# Altium PCB MC0202S_V0.91.pcbdoc
Units mm, origin at the board's own origin, x right, y up, seen from the top; angles counter-clockwise.
Board outline 100 x 68 mm, 4 copper layers (Top Layer, Mid-Layer 1, Mid-Layer 2, Bottom Layer); 151 components, 104 nets, 506 pads, 163 vias.
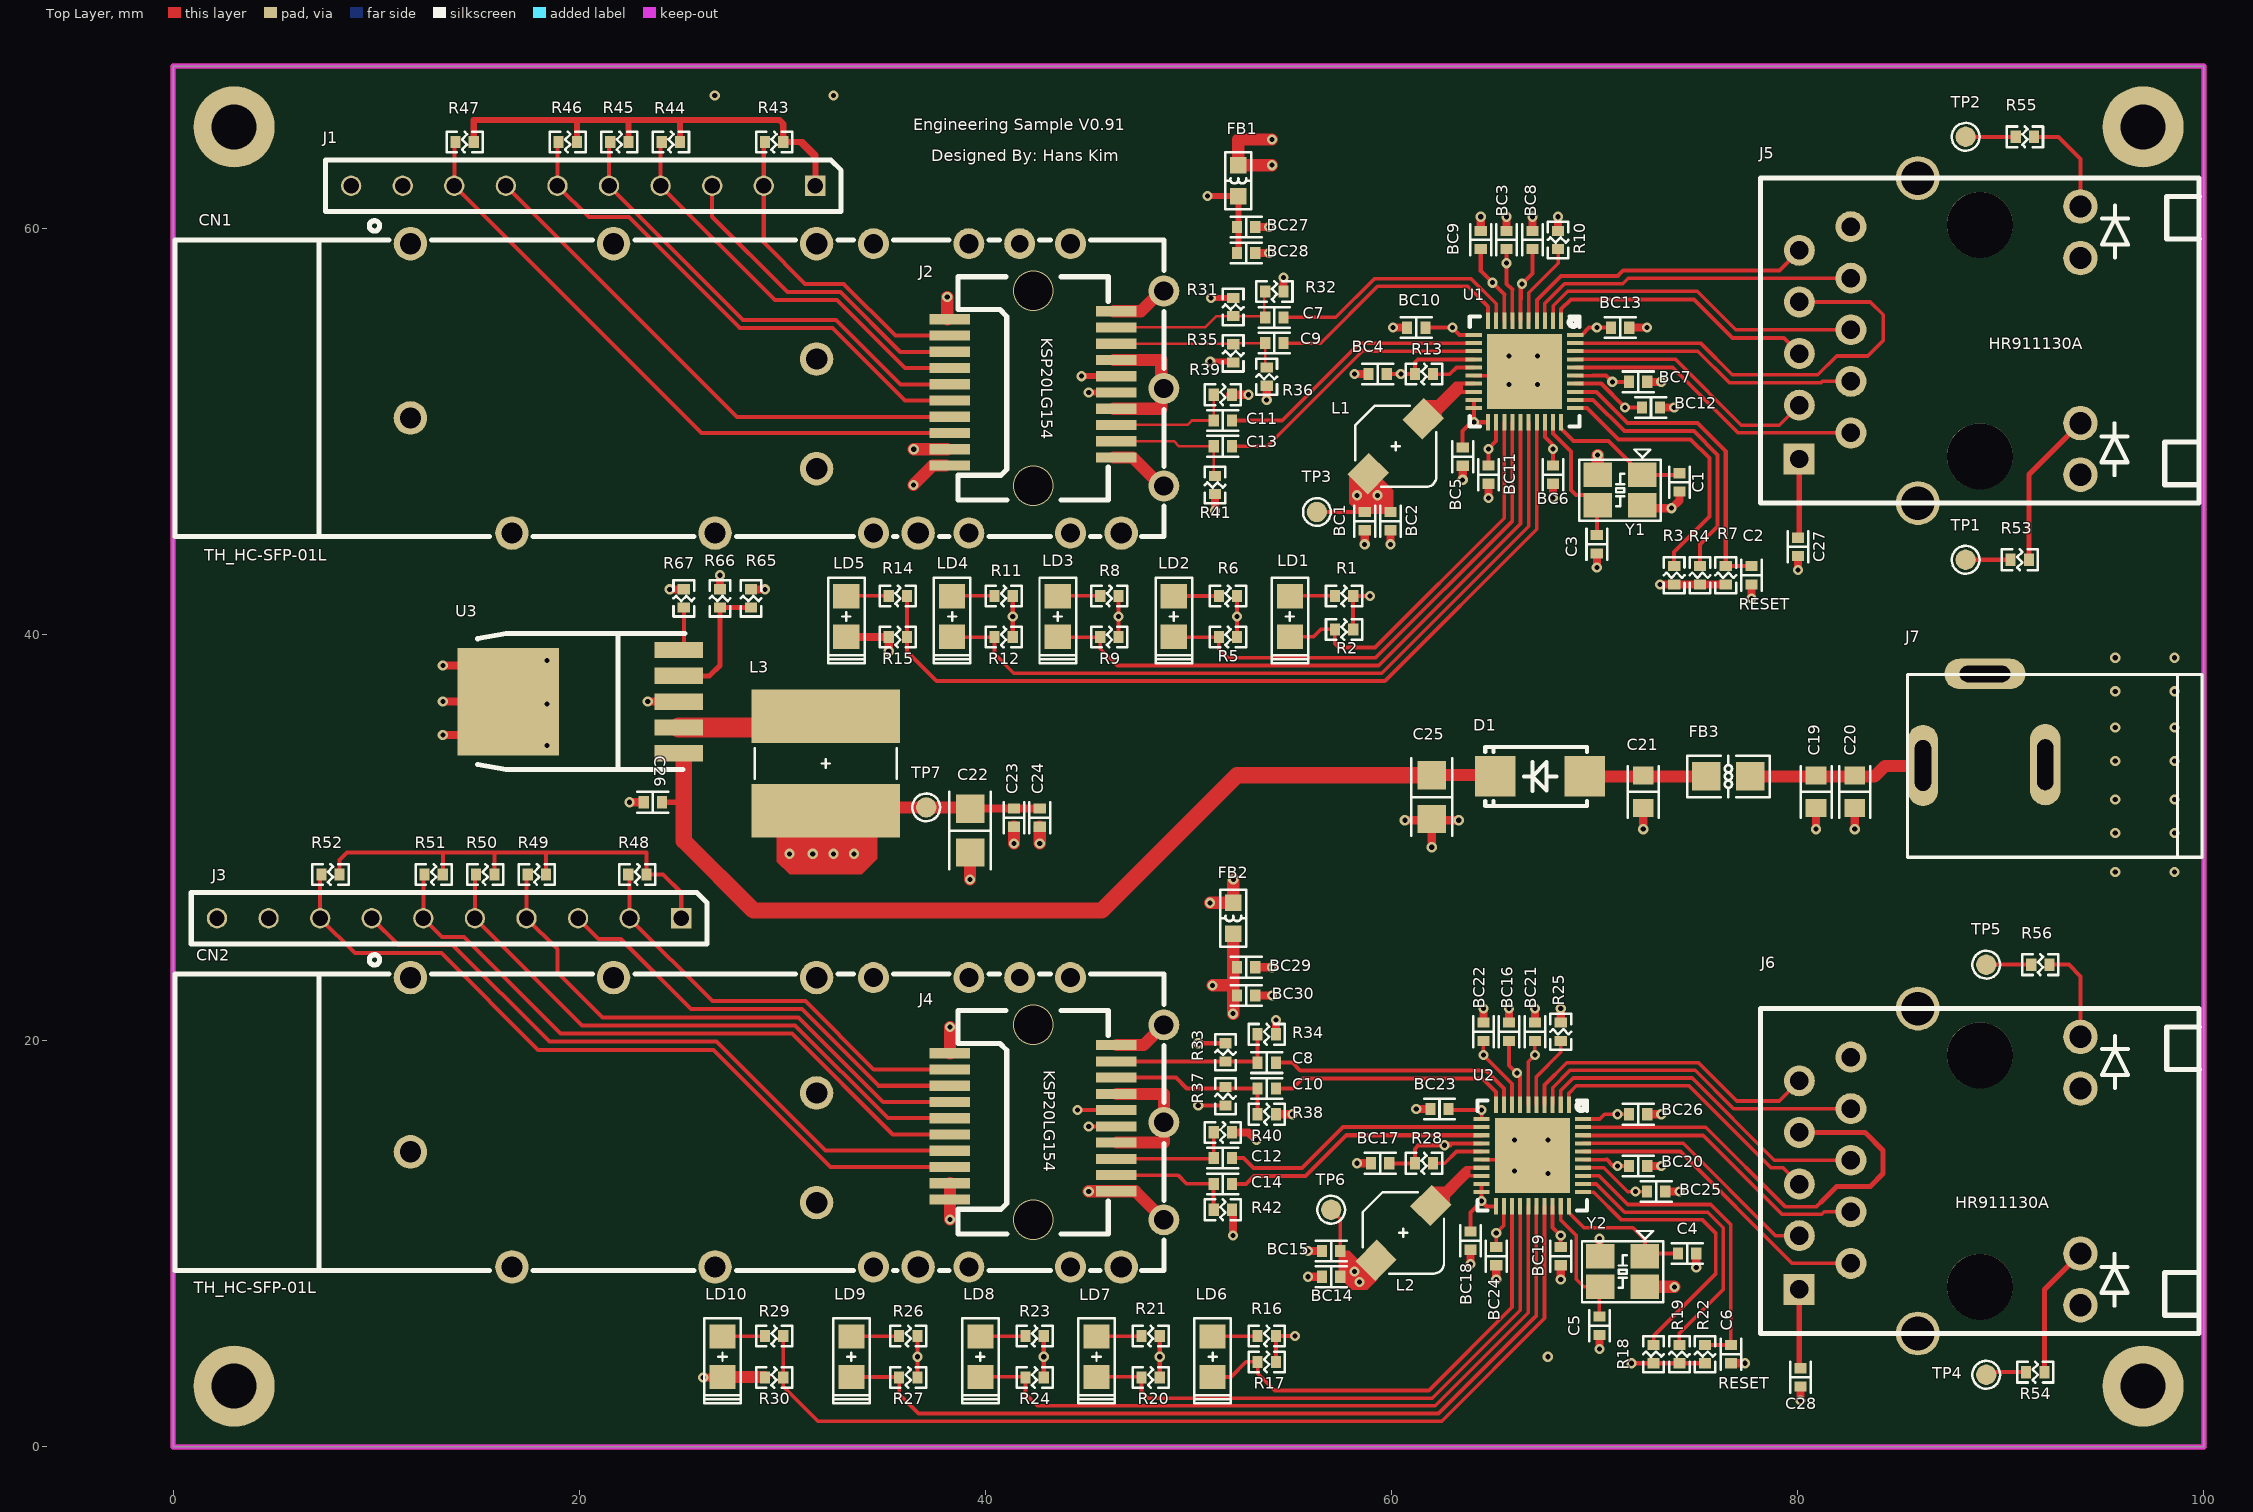
[diagram p0: Top Layer view]
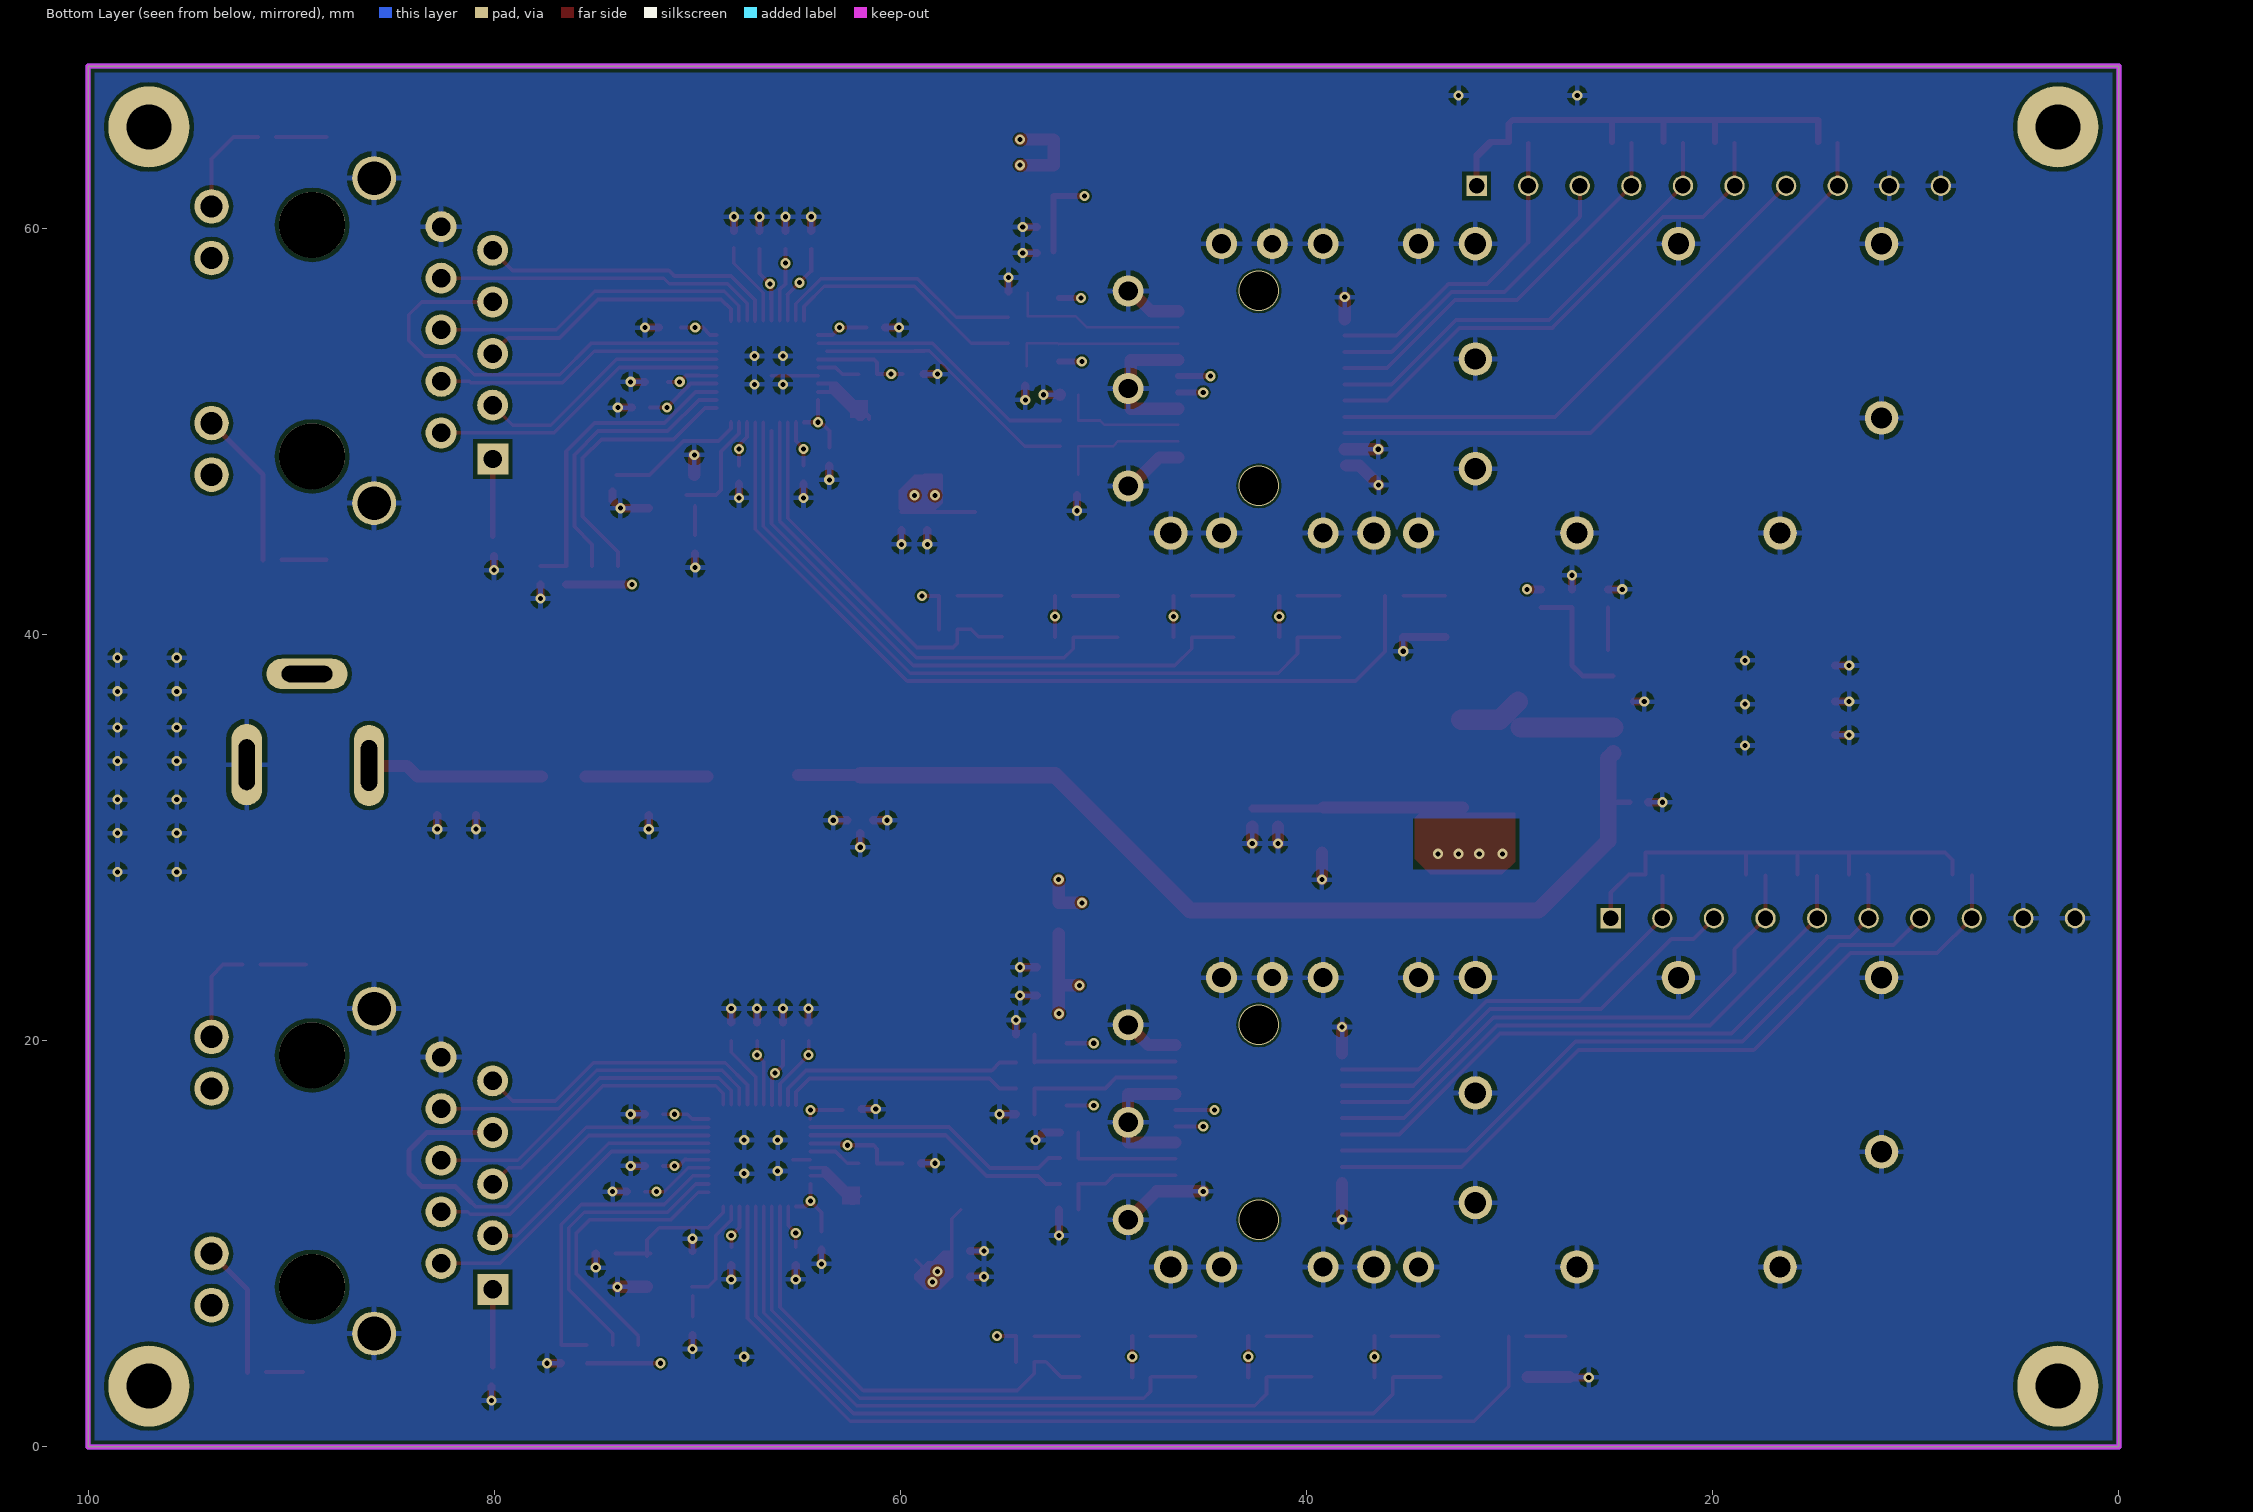
[diagram p1: Bottom Layer view, seen from below]
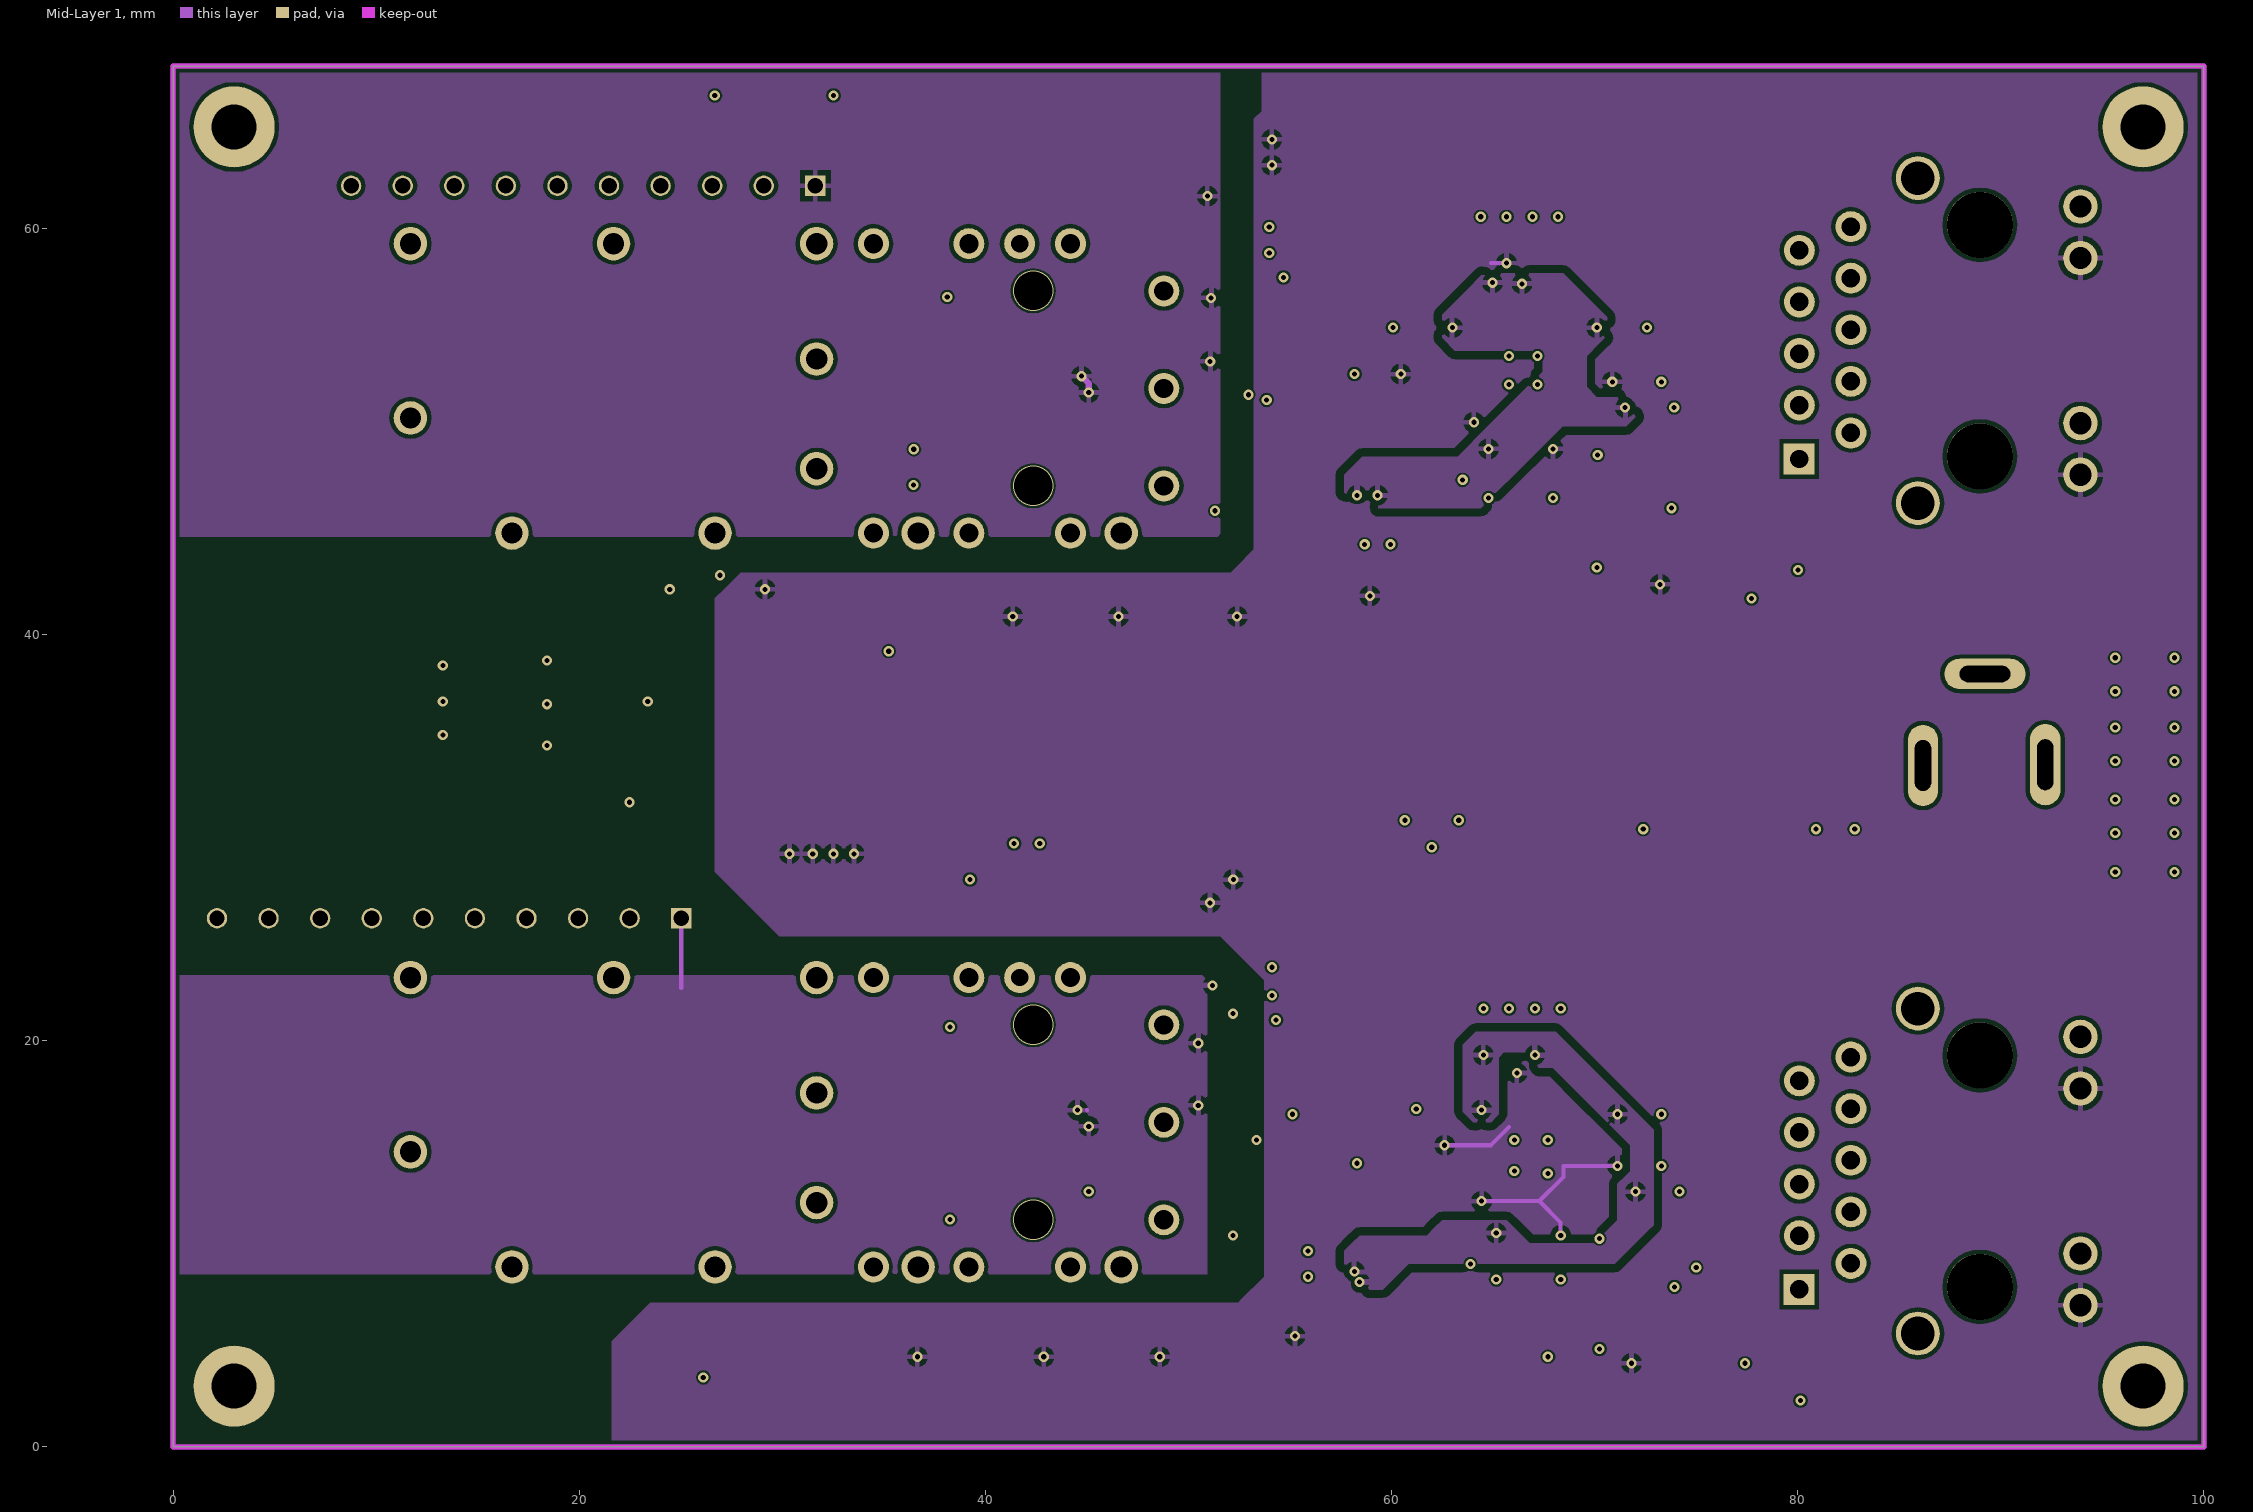
[diagram p2: Mid-Layer 1]
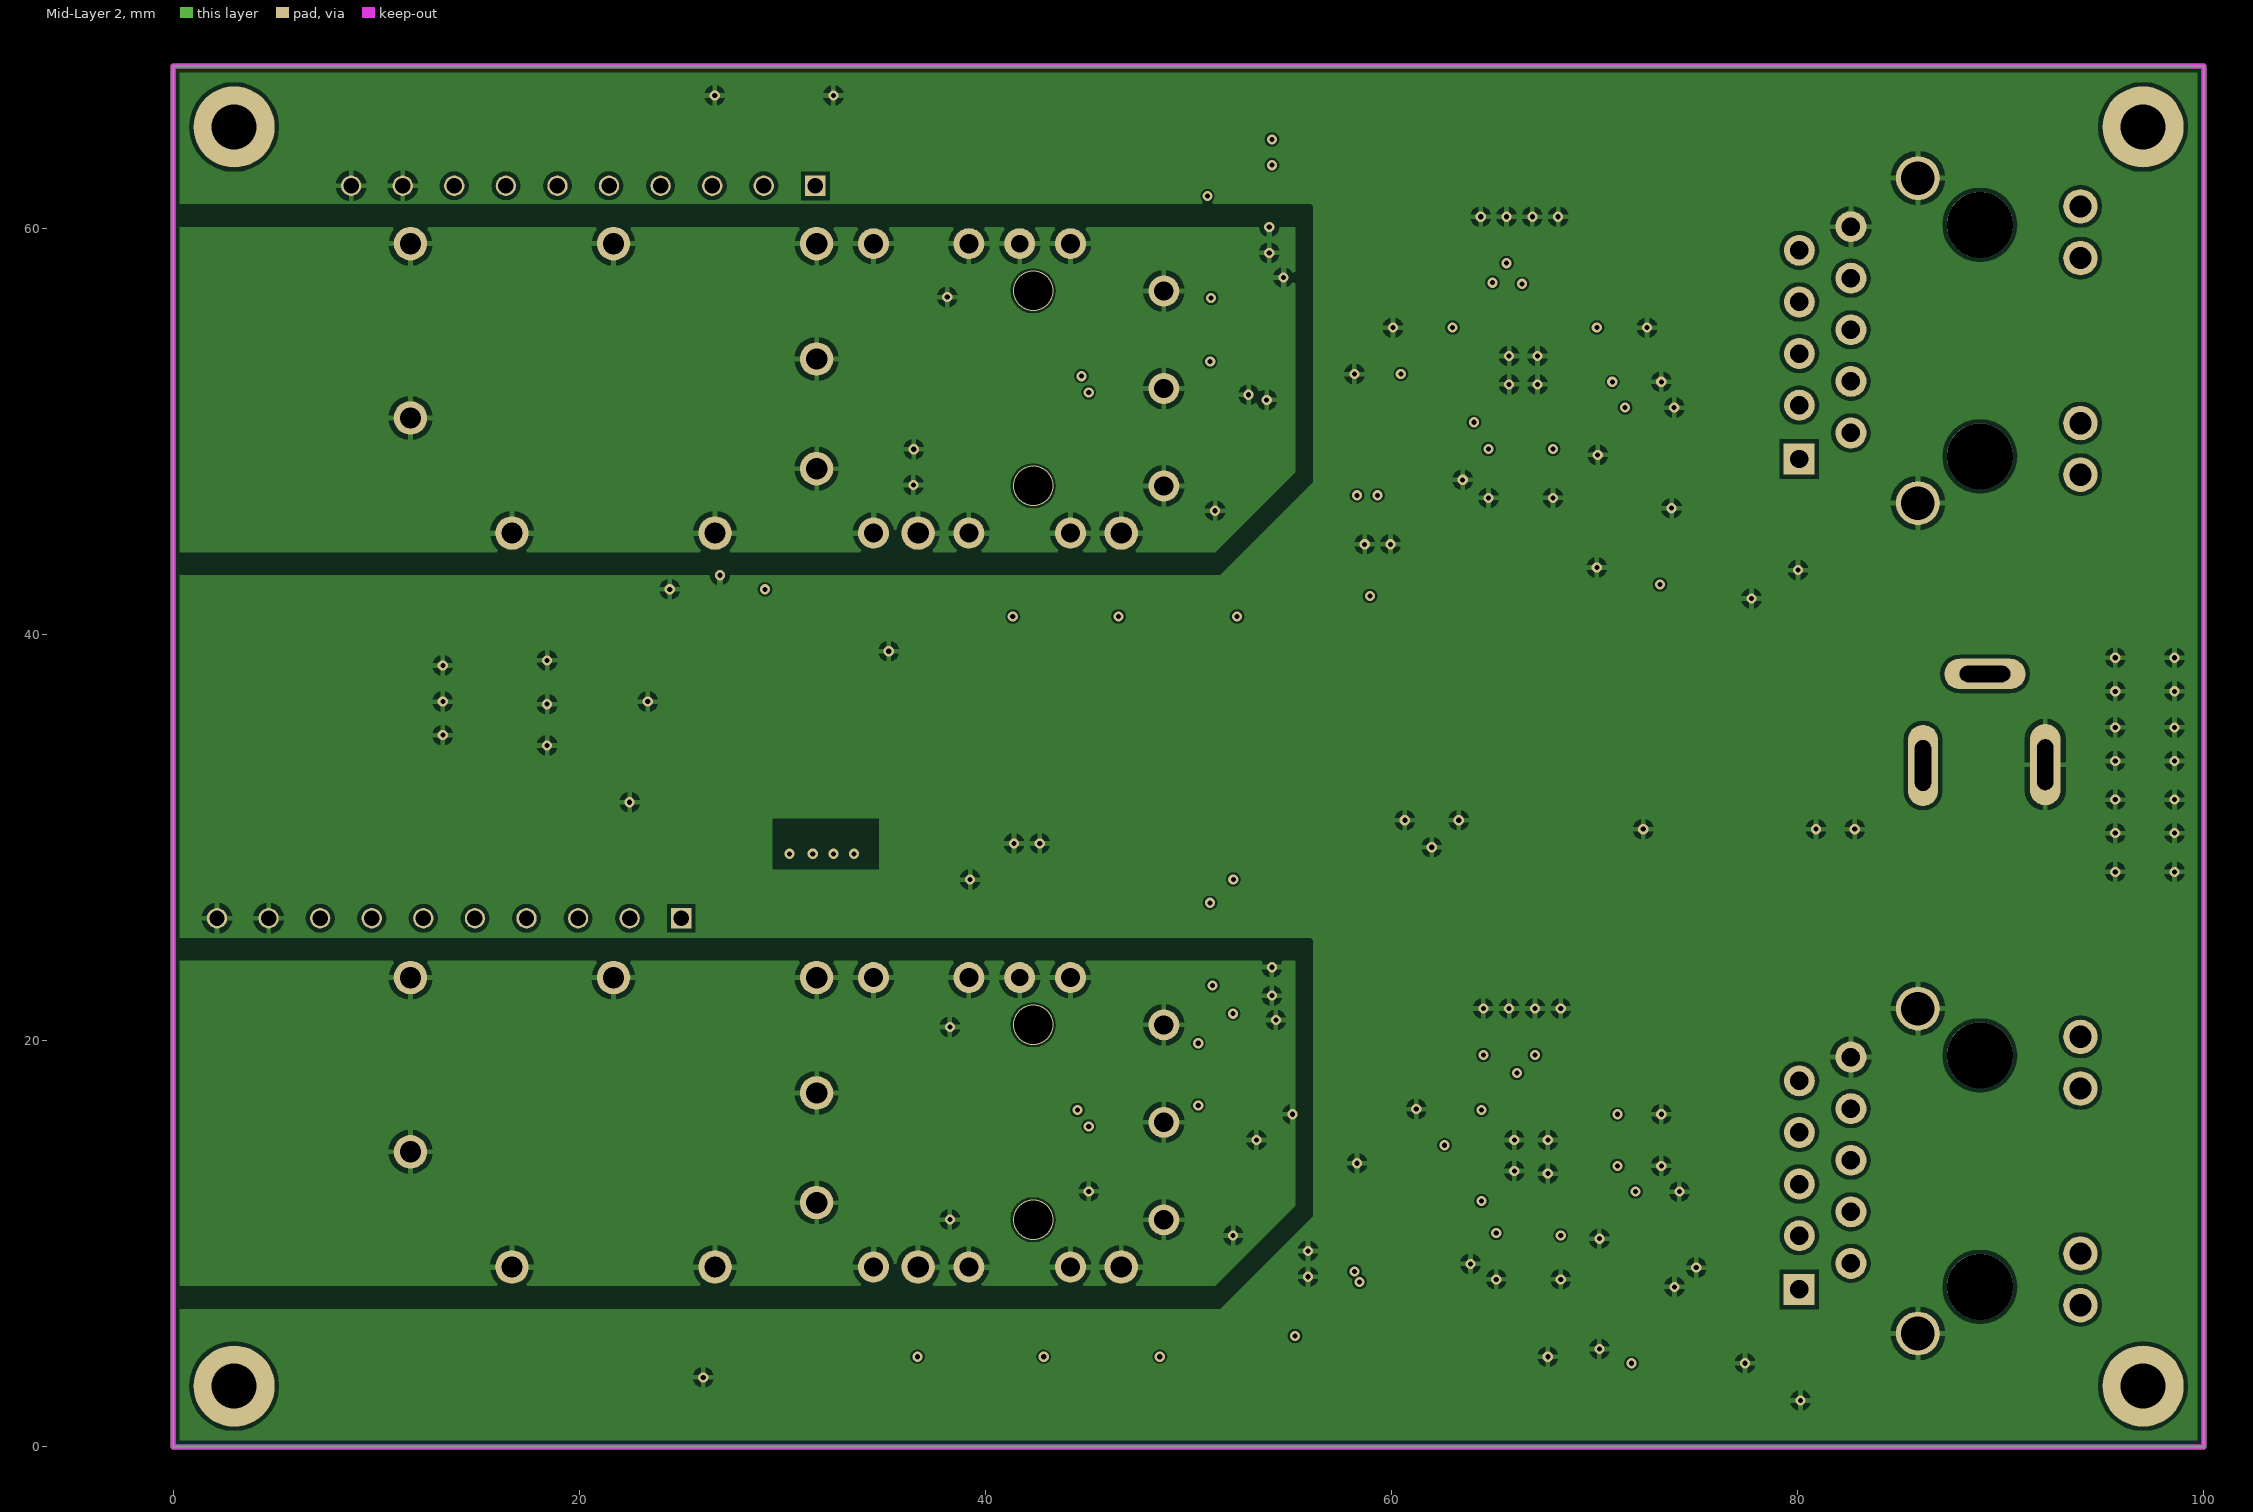
[diagram p3: Mid-Layer 2]

## Layer stack, top to bottom
Top Solder: solder mask 0.0102, Solder Resist, Dk 3.5
Top Layer: signal copper 0.0356
Dielectric1: dielectric 0.32, FR-4, Dk 4.8
Mid-Layer 1: signal copper 0.0356
Dielectric2: dielectric 0.32, FR-4, Dk 4.8
Mid-Layer 2: signal copper 0.0356
Dielectric3: dielectric 0.32, FR-4, Dk 4.8
Bottom Layer: signal copper 0.0356
Bottom Solder: solder mask 0.0102, Solder Resist, Dk 3.5

## Board outline
0,0 100,0 100,68 0,68

## Design rules (kind name [scope] priority, off if disabled: settings)
Clearance Clearance_4 [isRegion vs IsRegion] p1: gap=0.4
Clearance Clearance_3 [HasFootprint('QFN-40_5X5') or HasFootprint('RP-4_1005') vs HasFootprint('QFN-40_5X5') or HasFootprint('RP-4_1005')] p2: gap=0.1
Clearance Clearance_2 [InNetClass('ETH') vs InNetClass('ETH')] p3: gap=0.127
Clearance Clearance_1 [isVia] p4: gap=0.1
Clearance [All] p5: gap=0.2
ComponentClearance ComponentClearance_1 [InComponent('CN1') or InComponent('CN2') vs InComponent('J2') or InComponent('J4')] p1: gap=0 collisioncheckmode=3 verticalgap=0 showdistances=FALSE
ComponentClearance [All] p2: gap=0.1 collisioncheckmode=3 verticalgap=0.1 showdistances=FALSE
HoleSize [All] p1: absolutevalues=TRUE maxlimit=5.12 minlimit=0.025 maxpercent=80.000 minpercent=20.000
MinimumSolderMaskSliver MinimumSolderMaskSliver_2 [isVia vs isVia] p1: minsoldermaskwidth=0.1
MinimumSolderMaskSliver MinimumSolderMaskSliver_1 [IsPad vs isPad] p2: minsoldermaskwidth=0.05
MinimumSolderMaskSliver [All] p3: minsoldermaskwidth=0.1
PolygonConnect [All] p1: connectstyle=Relief reliefconductorwidth=0.254 reliefentries=4 polygonreliefangle="90 Angle" airgapwidth=0.254
RoutingVias [All] p1: holewidth=0.25 width=0.5 viastyle="Through Hole" minholewidth=0.25 minwidth=0.5 maxholewidth=0.25 maxwidth=0.5
SilkToSilkClearance [All] p1: silktosilkclearance=0.01
SilkToSolderMaskClearance [IsPad] p1: minsilkscreentomaskgap=0 clearancetoexposedcopper=TRUE
SolderMaskExpansion [All] p1: expansion=0.102
Width Width_1 [InNetClass('ETH')] p1: maxlimit=0.2 minlimit=0.127 preferedwidth=0.178
Width [All] p2: maxlimit=1 minlimit=0.127 preferedwidth=0.2
24 further rules are at their usual default settings.

## Components (designator, comment, footprint, x,y, rotation, side; value= is the part's Value field where it differs from the comment)
BC1 "1uF" CS-1005 58.674,45.593 r270 top
BC2 "0.1uF" CS-1005 59.944,45.593 r270 top
BC3 "0.1uF" CS-1005 65.659,59.436 r90 top
BC4 "0.1uF" CS-1005 59.309,52.832 r180 top
BC5 "0.1uF" CS-1005 63.5,48.768 r270 top
BC6 "0.1uF" CS-1005 67.945,47.879 r270 top
BC7 "0.1uF" CS-1005 72.136,52.451 r0 top
BC8 "0.1uF" CS-1005 66.929,59.436 r90 top
BC9 "0.1uF" CS-1005 64.389,59.436 r90 top
BC10 "0.1uF" CS-1005 61.214,55.118 r180 top
BC11 "0.1uF" CS-1005 64.77,47.879 r270 top
BC12 "0.1uF" CS-1005 72.771,51.181 r0 top
BC13 "0.1uF" CS-1005 71.247,55.118 r0 top
BC14 "1uF" CS-1005 57.023,8.382 r180 top
BC15 "0.1uF" CS-1005 57.023,9.652 r180 top
BC16 "0.1uF" CS-1005 65.786,20.447 r90 top
BC17 "0.1uF" CS-1005 59.436,13.97 r180 top
BC18 "0.1uF" CS-1005 63.881,10.16 r270 top
BC19 "0.1uF" CS-1005 68.326,9.398 r270 top
BC20 "0.1uF" CS-1005 72.136,13.843 r0 top
BC21 "0.1uF" CS-1005 67.056,20.447 r90 top
BC22 "0.1uF" CS-1005 64.516,20.447 r90 top
BC23 "0.1uF" CS-1005 62.357,16.637 r180 top
BC24 "0.1uF" CS-1005 65.151,9.398 r270 top
BC25 "0.1uF" CS-1005 73.025,12.573 r0 top
BC26 "0.1uF" CS-1005 72.136,16.383 r0 top
BC27 "0.1uF" CS-1005 52.832,60.071 r180 top
BC28 "1uF" CS-1005 52.832,58.801 r180 top
BC29 "0.1uF" CS-1005 52.832,23.622 r180 top
BC30 "1uF" CS-1005 52.832,22.225 r180 top
C1 "12pF" CS-1005 74.168,47.498 r270 top
C2 "0.1uF" CS-1005 77.724,42.926 r270 top
C3 "12pF" CS-1005 70.104,44.45 r270 top
C4 "12pF" CS-1005 74.549,9.525 r0 top
C5 "12pF" CS-1005 70.231,5.969 r270 top
C6 "0.1uF" CS-1005 76.708,4.572 r270 top
C7 "0.1uF" CS-1005 54.229,55.626 r0 top
C8 "0.1uF" CS-1005 53.848,18.923 r0 top
C9 "0.1uF" CS-1005 54.229,54.356 r0 top
C10 "0.1uF" CS-1005 53.848,17.653 r0 top
C11 "0.1uF" CS-1005 51.689,50.546 r0 top
C12 "0.1uF" CS-1005 51.689,14.224 r0 top
C13 "0.1uF" CS-1005 51.689,49.276 r0 top
C14 "0.1uF" CS-1005 51.689,12.954 r0 top
C19 "0.1uF" CS-1608 80.899,32.258 r270 top
C20 "1nF" CS-1608 82.804,32.258 r270 top
C21 "0.1uF" CS-1608 72.39,32.258 r270 top
C22 "10uF" CS-2012 39.243,30.353 r270 top
C23 "0.1uF" CS-1005 41.402,30.988 r270 top
C24 "10nF" CS-1005 42.672,30.988 r270 top
C25 "10uF" CS-2012 61.976,32.004 r270 top
C26 "0.1uF" CS-1005 23.622,31.75 r180 top
C27 "0.1uF" CS-1005 80.01,44.323 r90 top
C28 "0.1uF" CS-1005 80.137,3.429 r90 top
CN1 "TH_HC-SFP-01L" TH_HC-SFP-01L 30.234,52.128 r270 top
CN2 "TH_HC-SFP-01L" TH_HC-SFP-01L 30.234,15.989 r270 top
D1 "RB051L-40" SOD-106 67.31,33.02 r180 top
FB1 "600" LS-1608 52.451,62.357 r270 top
FB2 "600" LS-1608 52.203,26.035 r270 top
FB3 "60" LS-2012 76.581,33.02 r180 top
J1 "CON 10P" Header_2.54_10p 31.623,62.103 r180 top
J2 "KSP20LG154" KSP20LG154 42.346,52.128 r270 top
J3 "CON 10P" Header_2.54_10p 25.019,26.035 r180 top
J4 "KSP20LG154" KSP20LG154 42.346,15.989 r270 top
J5 "HR911130A" HR911130A 86.995,54.483 r90 top
J6 "HR911130A" HR911130A 86.995,13.589 r90 top
J7 "DC005" DC005 89.408,33.655 r270 top
L1 "2.2uH" CDRH3D16NP 60.198,49.276 r180 top
L2 "2.2uH" CDRH3D16NP 60.579,10.541 r180 top
L3 "100uH" CDRH6D38NP 32.131,33.655 r0 top
LD1 "LED" LED2012 54.991,40.894 r90 top
LD2 "LED" LED2012 49.276,40.894 r90 top
LD3 "LED" LED2012 43.561,40.894 r90 top
LD4 "LED" LED2012 38.354,40.894 r90 top
LD5 "LED" LED2012 33.147,40.894 r90 top
LD6 "LED" LED2012 51.181,4.445 r90 top
LD7 "LED" LED2012 45.466,4.445 r90 top
LD8 "LED" LED2012 39.751,4.445 r90 top
LD9 "LED" LED2012 33.401,4.445 r90 top
LD10 "LED" LED2012 27.051,4.445 r90 top
R1 "470" RS-1005 57.658,41.91 r180 top
R2 "4.7K" RS-1005 57.658,40.259 r180 top
R3 "4.7K" RS-1005 73.914,42.926 r90 top
R4 "4.7K" RS-1005 75.184,42.926 r90 top
R5 "4.7K" RS-1005 51.943,39.878 r180 top
R6 "470" RS-1005 51.943,41.91 r180 top
R7 "4.7K" RS-1005 76.454,42.926 r90 top
R8 "4.7K" RS-1005 46.101,41.91 r180 top
R9 "4.7K" RS-1005 46.101,39.878 r180 top
R10 "2.5K_F" RS-1005 68.199,59.436 r270 top
R11 "4.7K" RS-1005 40.894,41.91 r180 top
R12 "4.7K" RS-1005 40.894,39.878 r180 top
R13 "4.7K" RS-1005 61.595,52.832 r0 top
R14 "470" RS-1005 35.687,41.91 r180 top
R15 "4.7K" RS-1005 35.687,39.878 r180 top
R16 "470" RS-1005 53.848,5.461 r180 top
R17 "4.7K" RS-1005 53.848,4.191 r180 top
R18 "4.7K" RS-1005 72.898,4.572 r90 top
R19 "4.7K" RS-1005 74.168,4.572 r90 top
R20 "4.7K" RS-1005 48.133,3.429 r180 top
R21 "470" RS-1005 48.133,5.461 r180 top
R22 "4.7K" RS-1005 75.438,4.572 r90 top
R23 "4.7K" RS-1005 42.418,5.461 r180 top
R24 "4.7K" RS-1005 42.418,3.429 r180 top
R25 "2.5K_F" RS-1005 68.326,20.447 r270 top
R26 "4.7K" RS-1005 36.195,5.461 r180 top
R27 "4.7K" RS-1005 36.195,3.429 r180 top
R28 "4.7K" RS-1005 61.595,13.97 r0 top
R29 "470" RS-1005 29.591,5.461 r180 top
R30 "4.7K" RS-1005 29.591,3.429 r180 top
R31 "10K" RS-1005 52.197,56.134 r90 top
R32 "10K" RS-1005 54.229,56.896 r180 top
R33 "10K" RS-1005 51.816,19.431 r90 top
R34 "10K" RS-1005 53.848,20.32 r180 top
R35 "10K" RS-1005 52.197,53.848 r270 top
R36 "10K" RS-1005 53.848,52.705 r90 top
R37 "10K" RS-1005 51.816,17.272 r270 top
R38 "10K" RS-1005 53.848,16.383 r180 top
R39 "10K" RS-1005 51.689,51.816 r180 top
R40 "10K" RS-1005 51.689,15.494 r180 top
R41 "10K" RS-1005 51.308,47.371 r90 top
R42 "10K" RS-1005 51.689,11.684 r180 top
R43 "10K" RS-1005 29.591,64.262 r0 top
R44 "10K" RS-1005 24.511,64.262 r0 top
R45 "10K" RS-1005 21.971,64.262 r0 top
R46 "10K" RS-1005 19.431,64.262 r0 top
R47 "10K" RS-1005 14.351,64.262 r0 top
R48 "10K" RS-1005 22.86,28.194 r0 top
R49 "10K" RS-1005 17.907,28.194 r0 top
R50 "10K" RS-1005 15.367,28.194 r0 top
R51 "10K" RS-1005 12.827,28.194 r0 top
R52 "10K" RS-1005 7.747,28.194 r0 top
R53 "470" RS-1005 90.932,43.688 r0 top
R54 "470" RS-1005 91.694,3.683 r0 top
R55 "470" RS-1005 91.186,64.516 r0 top
R56 "470" RS-1005 91.948,23.749 r0 top
R65 "10K_1%" RS-1005 28.448,41.783 r90 top
R66 "6K_1%" RS-1005 26.924,41.783 r270 top
R67 "0" RS-1005 25.146,41.783 r270 top
TP1 "LED0" TP-SMD(1.0) 88.265,43.688 r90 top
TP2 "LED1" TP-SMD(1.0) 88.265,64.516 r90 top
TP3 "3.3V" TP-SMD(1.0) 56.319,46.043 r90 top
TP4 "LED0" TP-SMD(1.0) 89.281,3.556 r90 top
TP5 "LED1" TP-SMD(1.0) 89.281,23.749 r90 top
TP6 "3.3V" TP-SMD(1.0) 57.023,11.684 r90 top
TP7 "3.3V" TP-SMD(1.0) 37.084,31.496 r90 top
U1 "RTL8213B" QFN-40_5x5 66.548,52.959 r180 top
U2 "RTL8213B" QFN-40_5x5 66.929,14.351 r180 top
U3 "XL7015E1" TO252-5L 20.701,36.703 r90 top
Y1 "25MHz-S20P-SX32" SX-32 71.247,47.117 r0 top
Y2 "25MHz-S20P-SX32" SX-32 71.374,8.636 r0 top

## Footprints (in the part's own frame and the unit in brackets; to place one, negate y for a bottom-side part, rotate by r counter-clockwise, add the part's x,y. Pads: shape width x height; smd on the part's side, far side on the other; paste and mask are expansions set on the pad)
CDRH3D16NP [mm]
  rect 1.5x1.4 smd rot 45: 1(1.35,1.35) 2(-1.35,-1.35)
  Top Layer pour cut-out: -1.973,1.727 -2,-0.7 -0.7,-2 1.025,-2 2,-1.025 2,0.7 0.7,2 -1.7,2
  silkscreen extent -2,-2 2,2
CDRH6D38NP [mm]
  rect 7.3x2.65 smd: 1(0,-2.325) 2(0,2.325)
  silkscreen extent -3.5,-0.75 3.5,0.75
CS-1005 [mm]
  rect 0.5x0.6 smd: 1(-0.45,0) 2(0.45,0)
  silkscreen extent -0.76,-0.51 0.76,0.51
CS-1608 [mil]
  rect 35x40 smd: 1(-31.5,0) 2(31.5,0)
  silkscreen extent -50,-30 50,30
CS-2012 [mil]
  rect 55x55 smd: 1(-42.5,0) 2(42.5,0)
  silkscreen extent -75,-40 75,40
DC005 [mm]
  oval 4x1.5 hole 0.8 slot 2.5 at 0 deg: 1(0.059,2.779) 3(0.092,-3.243)
  oval 1.5x4 hole 0.8 slot 2.5 at 90 deg: 2(-4.41,-0.191)
  silkscreen extent -4.38,-4.01 4.62,10.49
Header_2.54_10p [mm]
  rect 1x1 hole 0.762: 1(0,0)
  round 1 hole 0.762: 2(2.54,0) 3(5.08,0) 4(7.62,0) 5(10.16,0) 6(12.7,0) 7(15.24,0) 8(17.78,0) 9(20.32,0) 10(22.86,0)
  silkscreen extent -1.27,-1.27 24.13,1.27
HR911130A [mil]
  rect 60x60 hole 35.83 paste+0 mask+2: 1(-229.63,272.62)
  round 60 hole 35.83 paste+0 mask+2: 2(-179.1,172.38) 3(-125.2,272.38) 4(-79.1,172.38) 5(-25.2,272.38) 6(20.9,172.38) 7(74.8,272.38) 8(120.9,172.38) 9(174.8,272.38) 10(220.9,172.38)
  round 66.93 hole 43.31 paste+0 mask+2: 11(-260,-272.62) 12(-160,-272.62) 13(160,-272.62) 14(260,-272.62)
  round 85 hole 65 paste+0 mask+2: M1(-315,42.48) M2(315,42.48)
  round 127.95 hole 127.95 unplated paste+0: ""(-224.4,-77.62) ""(224.4,-77.62)
  silkscreen extent -315,-503 315,347
KSP20LG154 [mm]
  rect 0.5x2 smd paste+0 mask+0.051: 1(-3.4,-4.1) 2(-2.6,-4.1) 3(-1.8,-4.1) 4(-1,-4.1) 5(-0.2,-4.1) 6(0.6,-4.1) 7(1.4,-4.1) 8(2.2,-4.1) 9(3,-4.1) 10(3.8,-4.1) 11(3.4,4.1) 12(2.6,4.1) 13(1.8,4.1) 14(1,4.1) 15(0.2,4.1) 16(-0.6,4.1) 17(-1.4,4.1) 18(-2.2,4.1) 19(-3,4.1) 20(-3.8,4.1)
  silkscreen extent -5.5,-3.7 5.5,3.7
LED2012 [mil]
  rect 47x51 smd: 1(39.37,0) 2(-39.37,0)
  silkscreen extent -91,-35 75,35
LS-1608 [mil]
  rect 32x32 smd: 1(-30,0) 2(30,0)
  silkscreen extent -55,-25 55,25
LS-2012 [mil]
  rect 55x55 smd: 1(-42.5,0) 2(42.5,0)
  silkscreen extent -80,-40 80,40
QFN-40_5x5 [mm]
  rect 0.2x0.8 smd paste-100 mask+0.05: 1(-1.8,-2.499) 2(-1.4,-2.499) 3(-1,-2.499) 4(-0.6,-2.499) 5(-0.2,-2.499) 6(0.2,-2.499) 7(0.6,-2.499) 8(1,-2.499) 9(1.4,-2.499) 10(1.8,-2.499) 21(1.8,2.499) 22(1.4,2.499) 23(1,2.499) 24(0.6,2.499) 25(0.2,2.499) 26(-0.2,2.499) 27(-0.6,2.499) 28(-1,2.499) 29(-1.4,2.499) 30(-1.8,2.499)
  rect 0.8x0.2 smd paste-100 mask+0.05: 11(2.499,-1.8) 12(2.499,-1.4) 13(2.499,-1) 14(2.499,-0.6) 15(2.499,-0.2) 16(2.499,0.2) 17(2.499,0.6) 18(2.499,1) 19(2.499,1.4) 20(2.499,1.8) 31(-2.499,1.8) 32(-2.499,1.4) 33(-2.499,1) 34(-2.499,0.6) 35(-2.499,0.2) 36(-2.499,-0.2) 37(-2.499,-0.6) 38(-2.499,-1) 39(-2.499,-1.4) 40(-2.499,-1.8)
  rect 3.7x3.7 smd paste-100 mask+0.05: PAD(0,0)
  silkscreen extent -2.7,-2.7 2.7,2.7
RS-1005 [mm]
  rect 0.5x0.6 smd: 1(-0.45,0) 2(0.45,0)
  silkscreen extent -0.89,-0.51 0.89,0.51
SOD-106 [mm]
  rrect0% 2x2 smd: 1(-2.2,0) 2(2.2,0)
  silkscreen extent -2.3,-1.45 2.7,1.45
SX-32 [mm]
  rect 1.4x1.2 smd: 1(1.1,0.75) 2(-1.1,0.75) 3(-1.1,-0.75) 4(1.1,-0.75)
  silkscreen extent -2,-1.5 2,2
TH_HC-SFP-01L [mm]
  round 1.65 hole 1.05 paste+0 mask+0.05: 1(-7.125,-18.55) 2(-7.125,-8.55) 3(-7.125,1.45) 11(7.125,16.45) 14(7.125,6.45) 16(7.125,-3.55) 17(7.125,-13.55) 18(1.455,-18.55) 19(3.955,1.45) 20(-1.445,1.45)
  round 1.524 hole 0.95 paste+0 mask+0.05: 4(-7.125,4.25) 5(-7.125,8.95) 7(-7.125,13.95) 8(-4.795,18.55) 9(0.005,18.55) 10(4.805,18.55) 12(7.125,13.95) 13(7.125,8.95) 15(7.125,4.25)
  round 1.524 hole 0.85 paste+0 mask+0.05: 6(-7.125,11.45)
  silkscreen extent -8.25,-30.15 7.3,18.55
TO252-5L [mm]
  rect 0.8x2.4 smd: 1(-2.54,-4.2) 2(-1.27,-4.2) 3(0,-4.2) 4(1.27,-4.2) 5(2.54,-4.2)
  rect 5.3x5 smd: 6(0,4.2)
  silkscreen extent -3.35,-4.5 3.35,5.7
TP-SMD(1.0) [mm]
  round 1 smd: 1(0,0)
  silkscreen extent -0.68,-0.68 0.68,0.68

## Free pads (board coordinates)
  round 4 hole 2.2: 1(3,3) 1(3,65) 1(97,3) 1(97,65)

## Via types
v1: diameter 0.5, hole 0.25, Top Layer to Bottom Layer, 159 vias
v2: diameter 2, hole 1.9, Top Layer to Bottom Layer, 4 vias

## Nets (pads, with @x,y where several pads share a name; then routed paths per layer and width w, separated by ;. In a path a pad name is that pad's centre, name@x,y a point inside that pad or via, vN(x,y) a via of type N, cw(c..) or ccw(c..) an arc to the next point about the centre after c; other vN are vias at no path point)
+3.3V: BC3.1 BC4.1 BC5.1 BC6.1 BC7.1 BC16.1 BC17.1 BC18.1 BC19.1 BC20.1 C22.1 C23.1 C24.1 FB1.1 FB2.1 J5.11 J5.13 J6.11 J6.13 L3.1 R1.1 R2.1 R3.1 R4.1 R5.1 R6.1 R7.1 R8.1 R9.1 R11.1 R12.1 R13.1 R16.1 R17.1 R18.1 R19.1 R20.1 R21.1 R22.1 R23.1 R24.1 R26.1 R27.1 R28.1 R65.2 TP7.1 U1.7 U1.14 U1.19 U1.20 U1.21 U1.28 U1.35 U2.7 U2.14 U2.19 U2.20 U2.21 U2.28 U2.35 | length 89.4
  Top Layer w0.178: U1.7 65.948,56.988 ; U1.35 69.923,52.759 ; U2.35 70.558,14.151
  Top Layer w0.2: R27.1 R26.1 ; R12.1 v1(41.344,40.894) R11.1 ; R24.1 R23.1 ; R9.1 R8.1 ; R20.1 R21.1 ; R5.1 R6.1 ; R17.1 R16.1 v1(55.245,5.461) ; R2.1 R1.1 v1(58.928,41.91) ; BC17.1 R28.1 61.145,14.674 61.33,14.859 v1(62.611,14.859) 62.9,14.859 62.992,14.951 ; BC4.1@59.886,52.832 v1(60.452,52.832) R13.1 61.145,53.398 61.306,53.559 U1.14 ; v1@62.611,14.951 62.992,14.951 ; BC5.1 63.5,50.038 v1@64.049,50.587 ; BC18.1 63.881,11.557 v1(64.43,12.106) ; U1.19 U1.20 v1@64.049,50.587 ; U2.19 U2.20 v1(64.43,12.106) ; U2.14 62.992,14.951 ; U1.21 v1(64.049,50.46) v1@64.049,50.587 ; U2.21 64.684,11.852 v1(64.43,12.106) ; BC3.1 v1(65.659,58.293) 65.659,57.277 65.948,56.988 ; BC16.1 65.786,18.796 66.329,18.253 U2.7 ; U1.28 67.548,49.742 67.945,49.345 BC6.1 ; U2.28 67.929,10.811 v1(68.326,10.414) BC19.1 ; 69.923,52.759 70.558,52.759 v1(70.866,52.451) 71.432,52.451 ; 70.558,14.151 70.6,14.151 70.908,13.843 v1(71.12,13.843) BC20.1 ; v1(71.813,4.122) R22.1
  Top Layer w0.4: R65.2 v1(29.141,42.233) ; C22.1 C24.1@42.667,31.432 ; v1(73.221,42.476) R3.1 R7.1
  Top Layer w0.6: L3.1@32.297,31.496 TP7.1 C22.1@39.179,31.496 ; v1(51.06,26.797) FB2.1 v1(52.203,27.94) ; v1(54.102,63.119) FB1.1 52.451,64.389 v1(54.102,64.389)
  Mid-Layer 1 w0.2: v1(62.611,14.859) 64.897,14.859 65.786,15.748 ; v1(64.43,12.106) 67.269,12.106 ; 64.897,58.293 v1(65.659,58.293) ; v1(68.326,10.414) 68.326,11.049 67.269,12.106 ; v1(71.12,13.843) 68.453,13.843 68.453,13.289 67.269,12.106
  other v1: 36.645,4.445 42.868,4.445 48.583,4.445 66.167,18.415 30.353,29.21 31.496,29.21 32.512,29.21 33.528,29.21 46.551,40.894 52.393,40.894 67.945,49.149
AGND: BC1.2 BC2.2 BC3.2 BC4.2 BC5.2 BC6.2 BC7.2 BC8.2 BC9.2 BC10.2 BC11.2 BC12.2 BC13.2 BC14.2 BC15.2 BC16.2 BC17.2 BC18.2 BC19.2 BC20.2 BC21.2 BC22.2 BC23.2 BC24.2 BC25.2 BC26.2 BC27.1 BC28.1 BC29.1 BC30.1 C1.2 C2.2 C3.2 C4.2 C5.2 C6.2 C19.2 C20.2 C21.2 C22.2 C23.2 C24.2 C25.2 C26.2 C27.1 C28.1 CN1.1 CN1.2 CN1.3 CN1.4 CN1.5 CN1.6 CN1.7 CN1.8 CN1.9 CN1.10 CN1.11 CN1.12 CN1.13 CN1.14 CN1.15 CN1.16 CN1.17 CN1.18 CN1.19 CN1.20 CN2.1 CN2.2 CN2.3 CN2.4 CN2.5 CN2.6 CN2.7 CN2.8 CN2.9 CN2.10 CN2.11 CN2.12 CN2.13 CN2.14 CN2.15 CN2.16 CN2.17 CN2.18 CN2.19 CN2.20 J1.9 J1.10 J2.1 J2.9 J2.10 J2.11 J2.14 J2.17 J2.20 J3.9 J3.10 J4.1 J4.9 J4.10 J4.11 J4.14 J4.17 J4.20 J5.10 J5.M1 J5.M2 J6.10 J6.M1 J6.M2 J7.1 LD5.2 LD10.2 R10.1 R15.2 R25.1 R30.2 R32.1 R34.1 R36.1 R38.1 R39.1 R40.1 R41.1 R42.1 R66.1 R67.1 U1.16 U1.PAD U2.16 U2.PAD U3.3 U3.6 Y1.2 Y1.4 Y2.2 Y2.4 | length 95
  Top Layer w0.178: U1.16 U1.PAD@66.348,52.759 ; U2.16 U2.PAD@65.305,14.151
  Top Layer w0.4: v1(13.277,35.052) 13.97,35.052 ; v1(13.277,36.703) 13.97,36.703 ; v1(13.277,38.481) 13.97,38.481 ; v1(22.479,31.75) C26.2 ; v1(23.368,36.703) U3.3@23.876,36.703 ; v1(24.453,42.233) R67.1 ; v1(26.104,3.429) LD10.2@26.797,3.429 ; R66.1 v1(26.924,42.926) ; LD5.2@33.163,39.878 R15.2 v1(35.237,39.185) ; v1(51.308,46.101) R41.1@51.308,46.863 ; R40.1 52.959,15.494 v1(53.34,15.113) ; R39.1 v1(52.959,51.816) ; v1(52.197,10.414) R42.1@52.197,11.684 ; BC30.1 v1(54.102,22.225) ; BC29.1 v1(54.102,23.622) ; BC28.1 v1(53.975,58.801) ; BC27.1 v1(53.975,60.071) ; v1(53.848,51.562) R36.1 ; R38.1 v1(55.118,16.383) ; R34.1 v1(54.298,21.024) ; R32.1 v1(54.679,57.589) ; v1(55.88,8.382) BC14.2 ; v1(55.88,9.652) BC15.2 ; v1(58.166,52.832) BC4.2 ; v1(58.293,13.97) BC17.2 ; v1(58.674,44.45) BC1.2 ; v1(59.944,44.45) BC2.2 ; v1(60.071,55.118) BC10.2 ; v1(60.648,30.861) C25.2@61.341,30.861 ; v1(61.214,16.637) BC23.2 ; v1(61.976,29.533) C25.2@61.976,30.226 ; C25.2@62.611,30.861 v1(63.304,30.861) ; v1(63.5,47.625) BC5.2 ; v1(63.881,9.017) BC18.2 ; BC9.2 v1(64.389,60.579) ; BC22.2 v1(64.516,21.59) ; v1(64.77,46.736) BC11.2 ; v1(65.151,8.255) BC24.2 ; BC3.2 v1(65.659,60.579) ; BC16.2 v1(65.786,21.59) ; BC8.2 v1(66.929,60.579) ; BC21.2 v1(67.056,21.59) ; v1(67.945,46.736) BC6.2 ; R10.1 v1(68.199,60.579) ; v1(68.326,8.255) BC19.2 ; R25.1 v1(68.326,21.59) ; v1(70.104,43.307) C3.2 ; v1(70.231,4.826) C5.2 ; Y2.2@70.231,9.652 v1(70.231,10.256) ; BC13.2@71.882,55.118 v1(72.575,55.118) ; v1(72.39,30.422) C21.2@72.39,31.115 ; Y1.4@72.39,46.228 v1(73.787,46.228) 74.168,46.609 C1.2 ; BC20.2 v1(73.279,13.843) ; BC26.2 v1(73.279,16.383) ; BC7.2 v1(73.279,52.451) ; BC12.2 v1(73.914,51.181) ; BC25.2 v1(74.168,12.573) ; v1(74.999,8.832) C4.2 ; C6.2 v1(77.401,4.122) ; v1(77.724,41.783) C2.2 ; v1(80.01,43.18) C27.1 ; v1(80.137,2.286) C28.1 ; v1(80.899,30.422) C19.2@80.899,31.115 ; v1(82.804,30.422) C20.2@82.804,31.115
  Top Layer w0.6: LD10.2 R30.2@29.125,3.445 ; v1(36.449,47.371) 37.407,48.329 J2.10@38.042,48.329 ; v1(36.469,49.129) J2.9@38.119,49.129 ; J2.1@38.119,55.528 v1(38.119,56.623) ; v1(38.246,11.195) J4.10 J4.9 ; J4.1 v1(38.246,20.682) ; v1(39.243,27.94) C22.2 ; v1(41.402,29.718) C23.2 ; v1(42.672,29.718) C24.2 ; v1(45.085,12.589) J4.11 47.379,12.589 CN2.10 ; J2.11@46.319,48.728 47.252,48.728 CN1.10@48.657,47.323 ; J2.14@46.319,51.128 J2.14 48.657,51.128 48.657,53.528 J2.17 J2.17@46.319,53.528 ; J2.20@46.319,55.928 47.662,55.928 CN1.8@48.657,56.924 ; J4.14 48.784,14.989 CN2.9 48.784,17.389 J4.17 ; J4.20 47.788,19.789 CN2.8 ; Y1.2 v1(70.147,48.852) ; Y2.4 v1(73.926,7.886)
  other v1: 67.691,4.445 67.691,13.462 66.04,13.589 66.04,15.113 67.691,15.113 95.631,28.321 98.552,28.321 95.631,30.226 98.552,30.226 95.631,31.877 98.552,31.877 95.631,33.782 98.552,33.782 18.415,34.544 95.631,35.433 98.552,35.433 18.415,36.576 95.631,37.211 98.552,37.211 18.415,38.735 95.631,38.862 98.552,38.862 65.786,52.324 67.183,52.324 65.786,53.721 67.183,53.721 26.67,66.548 32.512,66.548
N01813: R10.2 U1.5 | length 4.2
  Top Layer w0.178: U1.5 66.748,56.842 68.199,58.293 R10.2@68.199,59.055
N01857: R13.2 U1.15 | length 2.1
  Top Layer w0.178: 63.192,53.159 U1.15
  Top Layer w0.18: R13.2 62.865,52.832 63.192,53.159
N02024: L1.2 U1.17 U1.18 | length 4.2
  Top Layer w0.2: L1.2 61.548,50.771 63.137,52.359 U1.17 ; 63.135,51.959 U1.18
N03411: L3.2 U3.2 | length 7.7
  Top Layer w1: U3.2 L3.2@29.464,35.433 ; L3.2@29.591,36.703 30.48,35.814 L3.2@32.385,35.814
N03467: R65.1 R66.2 U3.4 | length 6.6
  Top Layer w0.254: U3.4 26.416,37.973 26.924,38.481 R66.2 R65.1
N04286: C25.1 C26.1 D1.2 U3.1 | length 49.6
  Top Layer w0.254: C26.1 25.146,31.75
  Top Layer w0.6: C25.1 D1.2@65.046,33.084
  Top Layer w0.8: U3.1 25.146,33.918 25.146,29.845 28.575,26.416 45.72,26.416 52.387,33.084 C25.1
N04319: C19.1 C20.1 FB3.1 J7.3 | length 9.4
  Top Layer w0.6: FB3.1 83.782,33.02 84.29,33.528 86.165,33.528 J7.3@86.165,34.198
N04493: R67.2 U3.5 | length 2.1
  Top Layer w0.2: U3.5@25.146,39.243 R67.2
N20626: J1.2 J2.2 R43.1 | length 15.8
  Top Layer w0.2: R43.1@29.083,64.204 J1.2 29.083,59.309 31.115,57.277 33.02,57.277 35.569,54.728 J2.2@38.119,54.728
N20630: J1.3 J2.3 | length 15.9
  Top Layer w0.2: J1.3 26.543,60.579 30.245,56.877 32.854,56.877 35.803,53.928 J2.3@38.119,53.928
N20636: J1.4 J2.4 R44.1 | length 19.9
  Top Layer w0.2: R44.1@24.003,64.204 J1.4 29.629,56.477 32.689,56.477 36.037,53.128 J2.4@38.119,53.128
N20642: J1.5 J2.5 R45.1 | length 22.8
  Top Layer w0.2: R45.1@21.463,64.204 J1.5 28.067,55.499 32.639,55.499 35.81,52.328 J2.5@38.119,52.328
N20648: J1.6 J2.6 R46.1 | length 25.7
  Top Layer w0.2: R46.1@18.923,64.204 J1.6 20.466,60.56 22.44,60.56 27.901,55.099 32.473,55.099 36.044,51.528 J2.6@38.119,51.528
N20654: J1.7 J2.7 | length 26.4
  Top Layer w0.2: J1.7 27.757,50.729 J2.7@38.119,50.729
N20660: J1.8 J2.8 R47.1 | length 31.4
  Top Layer w0.2: R47.1@13.843,64.204 J1.8 26.017,49.929 J2.8@38.119,49.929
N22123: J3.2 J4.2 R48.1 | length 20.9
  Top Layer w0.2: R48.1@22.479,28.125 J3.2 26.556,21.958 31.128,21.958 34.497,18.589 J4.2
N22131: J3.4 J4.4 R49.1 | length 27.4
  Top Layer w0.2: R49.1@17.399,28.136 J3.4 18.923,24.511 18.923,23.368 21.133,21.158 30.797,21.158 34.965,16.989 J4.4
N22135: J3.5 J4.5 R50.1 | length 29.6
  Top Layer w0.2: R50.1@14.859,28.125 J3.5 20.136,20.758 30.631,20.758 35.2,16.189 J4.5
N22139: J3.6 J4.6 R51.1 | length 32.5
  Top Layer w0.2: R51.1 12.319,28.136 J3.6 13.237,25.117 14.322,25.117 19.081,20.358 30.465,20.358 35.434,15.389 J4.6
N22147: J3.8 J4.8 R52.1 | length 38.2
  Top Layer w0.2: R52.1@7.239,28.136 J3.8 8.957,24.317 13.217,24.317 17.976,19.558 26.597,19.558 32.365,13.79 J4.8
N22159: J3.3 J4.3 | length 21.7
  Top Layer w0.2: J3.3 20.955,25.019 22.04,25.019 25.501,21.558 30.962,21.558 34.731,17.789 J4.3
N22191: J3.7 J4.7 | length 33.2
  Top Layer w0.2: J3.7 11.097,24.717 13.764,24.717 18.523,19.958 26.763,19.958 32.131,14.59 J4.7
N048171: LD4.1 R11.2 | length 2.1
  Top Layer w0.178: LD4.1@38.37,41.91 R11.2
N049111: LD3.1 R8.2 | length 2.1
  Top Layer w0.178: LD3.1@43.577,41.91 R8.2
N049271: LD2.1 R6.2 | length 2.2
  Top Layer w0.2: LD2.1@49.292,41.91 R6.2
N052690: LD1.1 R1.2 | length 2.2
  Top Layer w0.178: LD1.1@55.007,41.91 R1.2
N053670: LD5.1 R14.2 | length 2.1
  Top Layer w0.178: LD5.1@33.163,41.91 R14.2
N88350: C21.1 D1.1 FB3.2 | length 6
  Top Layer w0.6: D1.1 FB3.2
N96447: R25.2 U2.5 | length 3.6
  Top Layer w0.178: U2.5 67.129,18.234 68.326,19.431 R25.2
N96633: L2.2 U2.17 U2.18 | length 3.8
  Top Layer w0.178: L2.2@61.976,12.354 62.248,12.354 63.645,13.751 U2.17 ; 63.627,13.351 U2.18
N96771: R28.2 U2.15 | length 2.6
  Top Layer w0.178: R28.2 62.611,13.97 63.192,14.551 U2.15
N113878: J5.12 R53.2 | length 7.8
  Top Layer w0.254: R53.2 91.382,47.881 J5.12
N115541: J5.14 R55.2 | length 5.1
  Top Layer w0.2: R55.2 92.837,64.516 93.92,63.433 J5.14
N116614: J6.12 R54.2 | length 6.6
  Top Layer w0.254: R54.2 92.144,7.749 J6.12
N116618: J6.14 R56.2 | length 4.7
  Top Layer w0.2: R56.2 93.345,23.749 93.92,23.174 J6.14
N117614: C27.2 J5.1 | length 3.8
  Top Layer w0.254: C27.2@80.07,44.833 J5.1
N118028: C28.2 J6.1 | length 3.8
  Top Layer w0.254: C28.2@80.07,3.946 J6.1
N954571: LD6.1 R16.2 | length 2.2
  Top Layer w0.178: LD6.1@51.197,5.461 R16.2
N955931: LD7.1 R21.2 | length 2.2
  Top Layer w0.178: LD7.1@45.466,5.461 R21.2
N961031: LD8.1 R23.2 | length 2.2
  Top Layer w0.178: LD8.1@39.751,5.461 R23.2
N965031: LD9.1 R26.2 | length 2.3
  Top Layer w0.178: LD9.1@33.486,5.461 R26.2@35.814,5.461
N968511: LD10.1 R29.2 | length 2
  Top Layer w0.178: LD10.1@27.231,5.461 R29.2@29.21,5.461
P0_1V: BC1.1 BC2.1 BC8.1 BC9.1 BC10.1 BC11.1 BC12.1 BC13.1 L1.1 TP3.1 U1.6 U1.8 U1.11 U1.22 U1.34 U1.40 | length 21.9
  Top Layer w0.178: U1.8 65.548,56.753 ; U1.6 66.348,56.515
  Top Layer w0.2: TP3.1 BC2.1 ; BC10.1 v1(62.992,55.118) 63.351,54.759 U1.11 ; BC9.1 64.389,57.912 v1(64.969,57.332) 65.548,56.753 ; BC11.1 v1(64.77,49.149) 65.148,49.527 U1.22 ; 66.348,56.515 66.359,56.526 66.359,57.215 v1(66.421,57.277) 66.929,57.785 BC8.1 ; U1.34 70.322,52.359 v1(71.5,51.181) BC12.1 ; U1.40 69.364,54.759 69.723,55.118 BC13.1
  other v1: 58.293,46.863 59.309,46.863 70.104,55.118
P0_AUTOLOAD: LD1.2 R2.2 U1.23 | length 18.8
  Top Layer w0.178: LD1.2 56.15,39.894 56.515,40.259 R2.2 57.208,39.566 57.404,39.37 59.182,39.37 65.548,45.736 U1.23
P0_EN_PHY: LD3.2 R9.2 U1.25 | length 31.1
  Top Layer w0.178: LD3.2@43.577,39.878 R9.2 45.651,39.312 46.482,38.481 59.362,38.481 66.348,45.467 66.348,50.038
P0_ETH_AN: J5.3 U1.37 | length 12.8
  Top Layer w0.178: U1.37 73.976,53.559 77.223,50.312 79.085,50.312 J5.3
P0_ETH_AP: J5.2 U1.36 | length 14.9
  Top Layer w0.178: U1.36 73.841,53.159 77.066,49.934 J5.2
P0_ETH_BN: J5.7 U1.39 | length 22.2
  Top Layer w0.178: U1.39 75.208,54.359 76.775,52.792 80.986,52.792 81.915,53.721 83.439,53.721 84.201,54.483 84.201,55.753 83.571,56.383 J5.7
P0_ETH_BP: J5.4 U1.38 | length 14.2
  Top Layer w0.178: U1.38 75.073,53.959 76.618,52.414 81.142,52.414 81.202,52.474 J5.4
P0_ETH_CN: J5.6 U1.2 | length 16.5
  Top Layer w0.178: U1.2 67.959,55.469 67.959,56.19 68.673,56.904 75.049,56.904 76.939,55.014 J5.6
P0_ETH_CP: J5.5 U1.1 | length 13.6
  Top Layer w0.2: U1.1 68.348,56.029 68.834,56.515 74.888,56.515 76.793,54.61 79.309,54.61 J5.5
P0_ETH_DN: J5.9 U1.4 | length 15
  Top Layer w0.2: U1.4 67.148,56.48 68.339,57.671 71.133,57.671 71.405,57.943 79.096,57.943 J5.9
P0_ETH_DP: J5.8 U1.3 | length 16.4
  Top Layer w0.178: U1.3 67.548,56.314 68.516,57.282 71.379,57.282 71.651,57.554 J5.8
P0_HSIN: C13.2 U1.13 | length 13.9
  Top Layer w0.178: C13.2 53.875,49.276 58.58,53.981 59.309,53.981 ; 58.821,53.959 63.627,53.959
P0_HSIP: C11.2 U1.12 | length 13.5
  Top Layer w0.178: C11.2 54.61,50.546 58.423,54.359 U1.12
P0_HSON: C7.2 U1.9 | length 12.6
  Top Layer w0.178: C7.2 57.25,55.626 59.155,57.531 63.908,57.531 65.148,56.291 U1.9
P0_HSOP: C9.2 U1.10 | length 12.3
  Top Layer w0.178: C9.2 56.515,54.356 59.309,57.15 63.754,57.15 64.748,56.156 U1.10
P0_LED0: R53.1 TP1.1 | length 2.2
  Top Layer w0.2: TP1.1 R53.1
P0_LED1: R55.1 TP2.1 | length 2.5
  Top Layer w0.2: TP2.1 R55.1
P0_P3LED1: LD4.2 R12.2 U1.26 | length 37.7
  Top Layer w0.178: LD4.2@38.37,39.878 R12.2 40.444,39.058 41.399,38.103 59.519,38.103 66.748,45.332 U1.26
P0_RST: C2.1 R7.2 U1.33 | length 15.5
  Top Layer w0.2: U1.33 70.085,51.959 71.625,50.419 75.057,50.419 76.454,49.022 R7.2 C2.1
P0_SCL: R4.2 U1.32 | length 14
  Top Layer w0.2: U1.32 69.92,51.559 71.46,50.019 74.891,50.019 76.054,48.856 76.054,45.32 75.184,44.45 R4.2
P0_SDA: R3.2 U1.31 | length 13.7
  Top Layer w0.2: U1.31 69.621,51.159 71.161,49.619 74.726,49.619 75.654,48.691 75.654,45.809 73.914,44.069 R3.2
P0_SMI_ADDR: LD2.2 R5.2 U1.24 | length 25.1
  Top Layer w0.178: LD2.2@49.292,39.878 R5.2 51.493,39.312 51.943,38.862 59.209,38.862 65.948,45.601 U1.24
P0_SMI_SEL: R14.1 R15.1 U1.27 | length 42.7
  Top Layer w0.178: R14.1 R15.1 36.137,39.174 37.592,37.719 59.669,37.719 67.148,45.198 U1.27
P0_XTAL_I: C1.1 U1.30 Y1.1 | length 6.9
  Top Layer w0.2: U1.30 68.348,50.143 68.961,49.53 70.684,49.53 Y1.1 C1.1@73.971,47.867
P0_XTAL_O: C3.1 U1.29 Y1.3 | length 6.9
  Top Layer w0.2: U1.29 67.948,49.908 68.834,49.022 68.834,47.117 69.076,46.875 Y1.3@70.528,46.875 ; C3.1 Y1.3@70.104,46.324
P1_1V: BC14.1 BC15.1 BC21.1 BC22.1 BC23.1 BC24.1 BC25.1 BC26.1 L2.1 TP6.1 U2.6 U2.8 U2.11 U2.22 U2.34 U2.40 | length 22.8
  Top Layer w0.178: TP6.1 57.473,11.234 BC15.1 BC14.1 58.42,8.382 L2.1 ; BC23.1@62.848,16.596 v1(64.43,16.596) U2.11 ; BC22.1 v1(64.516,19.304) 65.929,17.891 U2.8 ; BC24.1 v1(65.151,10.541) 65.529,10.919 U2.22 ; U2.6 66.729,18.977 v1(67.056,19.304) BC21.1 ; U2.34 70.45,13.751 71.628,12.573 v1(72.009,12.573) BC25.1 ; U2.40 70.253,16.151 70.485,16.383 v1(71.12,16.383) BC26.1
  other v1: 58.42,8.128 58.166,8.636
P1_AUTOLOAD: LD6.2 R17.2 U2.23 | length 22.6
  Top Layer w0.178: LD6.2 52.086,3.445 52.832,4.191 R17.2 53.398,3.625 54.241,2.782 61.837,2.782 65.929,6.874 U2.23
P1_EN_PHY: LD8.2 R24.2 U2.25 | length 35.2
  Top Layer w0.178: LD8.2@39.751,3.461 41.936,3.461 R24.2@41.936,3.429 ; R24.2 41.968,2.609 42.551,2.026 62.15,2.026 66.729,6.605 U2.25
P1_ETH_AN: J6.3 U2.37 | length 12.5
  Top Layer w0.178: U2.37 74.357,14.951 78.899,10.409 J6.3
P1_ETH_AP: J6.2 U2.36 | length 15.5
  Top Layer w0.178: U2.36 74.222,14.551 79.733,9.04 J6.2
P1_ETH_BN: J6.7 U2.39 | length 22.7
  Top Layer w0.178: U2.39 75.462,15.751 79.375,11.838 80.926,11.838 81.153,12.065
  Top Layer w0.254: J6.7 83.317,15.489 84.201,14.605 84.201,13.462 83.566,12.827 81.915,12.827 81.153,12.065
P1_ETH_BP: J6.4 U2.38 | length 14.8
  Top Layer w0.178: U2.38 69.439,15.34 75.338,15.34 79.218,11.46 81.183,11.46 81.303,11.58 J6.4
P1_ETH_CN: J6.6 U2.2 | length 16.9
  Top Layer w0.178: U2.2 68.329,17.556 68.94,18.167 74.797,18.167 78.844,14.12 J6.6
P1_ETH_CP: J6.5 U2.1 | length 14.1
  Top Layer w0.178: U2.1 68.729,17.421 69.097,17.789 74.64,17.789 78.688,13.742 79.284,13.742 J6.5
P1_ETH_DN: J6.9 U2.4 | length 15.2
  Top Layer w0.178: U2.4 67.529,17.825 68.627,18.923 75.11,18.923 76.995,17.038 79.085,17.038 J6.9
P1_ETH_DP: J6.8 U2.3 | length 16.7
  Top Layer w0.178: U2.3 67.929,17.69 68.784,18.545 74.954,18.545 76.839,16.66 J6.8
P1_HSIN: C14.2 U2.13 | length 13.3
  Top Layer w0.2: C14.2 52.832,12.954 53.213,13.335 55.753,13.335 57.769,15.351 U2.13
P1_HSIP: C12.2 U2.12 | length 13.3
  Top Layer w0.2: C12.2 52.705,14.224 53.194,13.735 55.587,13.735 57.603,15.751 U2.12
P1_HSON: C8.2 U2.9 | length 12.6
  Top Layer w0.2: C8.2 55.118,18.923 55.499,18.542 64.643,18.542 65.529,17.656 U2.9
P1_HSOP: C10.2 U2.10 | length 11.9
  Top Layer w0.2: C10.2 55.118,17.653 55.607,18.142 64.477,18.142 65.129,17.49 U2.10
P1_LED0: R54.1 TP4.1 | length 1.8
  Top Layer w0.2: TP4.1@89.408,3.683 R54.1
P1_LED1: R56.1 TP5.1 | length 2.2
  Top Layer w0.2: TP5.1 R56.1
P1_P3LED1: LD9.2 R27.2 U2.26 | length 42.3
  Top Layer w0.178: LD9.2 35.729,3.445 R27.2@35.729,3.429 ; R27.2 35.745,2.609 36.706,1.648 62.307,1.648 67.129,6.47 U2.26
P1_RST: C6.1 R22.2 U2.33 | length 15.5
  Top Layer w0.178: U2.33 70.215,13.351 71.628,11.938 75.719,11.938 76.708,10.949 C6.1 R22.2
P1_SCL: R19.2 U2.32 | length 14.5
  Top Layer w0.178: U2.32 70.08,12.951 71.471,11.56 75.562,11.56 76.33,10.792 76.33,7.75 74.168,5.588 R19.2
P1_SDA: R18.2 U2.31 | length 14.1
  Top Layer w0.178: U2.31 69.946,12.551 71.315,11.182 75.311,11.182 75.952,10.541 75.952,8.515 72.898,5.461 R18.2
P1_SMI_ADDR: LD7.2 R20.2 U2.24 | length 28.6
  Top Layer w0.178: LD7.2@45.466,3.461 47.651,3.461 R20.2@47.651,3.429 ; R20.2 47.683,2.736 48.015,2.404 61.994,2.404 66.329,6.739 U2.24
P1_SMI_SEL: R29.1 R30.1 U2.27 | length 48.3
  Top Layer w0.178: R29.1 R30.1 30.041,2.979 31.75,1.27 62.463,1.27 67.529,6.336 U2.27
P1_XTAL_I: C4.1 U2.30 Y2.1 | length 7.2
  Top Layer w0.178: U2.30 68.729,11.539 69.473,10.795 71.882,10.795 72.474,10.203 Y2.1 ; Y2.1@72.301,9.525 C4.1@74.041,9.525
P1_XTAL_O: C5.1 U2.29 Y2.3 | length 6.3
  Top Layer w0.178: U2.29 68.329,11.173 69.088,10.414 69.088,8.255 69.457,7.886 70.231,7.886 Y2.3 ; C5.1 Y2.3@70.231,7.447
SFP0_RXN: C13.1 J2.12 R41.2 | length 6.4
  Top Layer w0.127: J2.12@46.319,49.528 49.278,49.528 49.53,49.276 C13.1 R41.2@51.239,47.879
SFP0_RXP: C11.1 J2.13 R39.2 | length 6.3
  Top Layer w0.127: J2.13@46.319,50.328 49.947,50.328 50.165,50.546 C11.1 R39.2
SFP0_TXN: C7.1 J2.19 R31.1 R32.2 | length 8.8
  Top Layer w0.127: J2.19@46.319,55.128 J2.19 50.81,55.128 51.366,55.684 53.721,55.684 R32.2@53.721,56.827
SFP0_TXP: C9.1 J2.18 R35.1 R36.2 | length 8.6
  Top Layer w0.127: J2.18@46.319,54.328 J2.18 R35.1@52.227,54.328 ; R35.1 R35.1@52.227,54.328 ; R36.2@53.779,53.224 C9.1 52.255,54.356 R35.1@52.227,54.328
SFP1_RXN: C14.1 J4.12 R42.2 | length 6.2
  Top Layer w0.178: J4.12 49.476,13.389 49.911,12.954 C14.1
  Top Layer w0.2: R42.2 C14.1
SFP1_RXP: C12.1 J4.13 R40.2 | length 6.1
  Top Layer w0.178: J4.13 51.204,14.189 C12.1 R40.2
SFP1_TXN: C8.1 J4.19 R33.1 R34.2 | length 8.4
  Top Layer w0.2: J4.19 53.337,18.989 C8.1@53.398,19.05 ; C8.1 C8.1@53.398,19.05 ; R34.2 C8.1@53.398,19.05
SFP1_TXP: C10.1 J4.18 R37.1 R38.2 | length 8.4
  Top Layer w0.2: J4.18 49.375,18.189 49.911,17.653 C10.1 R38.2
SFP_3V3A: BC27.2 BC28.2 FB1.2 J1.1 J2.15 J2.16 R31.2 R35.2 R43.2 R44.2 R45.2 R46.2 R47.2 | length 35
  Top Layer w0.3: R47.2 14.801,65.347 24.961,65.347 ; R46.2 19.881,65.289 ; R45.2 22.421,65.162 ; R44.2 24.961,65.347 ; J1.1 31.623,63.5 ; v1(44.727,52.728) J2.16@46.319,52.728 ; v1(45.085,51.928) J2.15@46.319,51.928 ; v1(50.927,61.595) FB1.2 BC28.2@52.451,58.87 ; v1(51.065,53.456) R35.2@52.197,53.456 ; v1(51.112,56.584) R31.2 ; 24.961,65.347 29.845,65.347 30.041,65.151 R43.2 30.861,64.262 ; 30.861,64.262 31.623,63.5 ; 30.861,64.262 30.988,64.262 31.623,63.627 31.623,63.5
  Mid-Layer 1 w0.3: v1(44.727,52.728) 45.085,52.371 v1(45.085,51.928)
SFP_3V3B: BC29.2 BC30.2 FB2.2 J3.1 J4.15 J4.16 R33.2 R37.2 R48.2 R49.2 R50.2 R51.2 R52.2 | length 38
  Top Layer w0.2: R52.2 8.197,28.898 8.567,29.268 18.415,29.268 ; R51.2 13.277,29.268 ; R50.2 15.817,29.199 ; R49.2 18.357,29.21 18.415,29.268 ; J3.1 25.019,27.305 24.13,28.194 R48.2 23.31,29.268 18.415,29.268 ; v1(44.529,16.589) J4.16 ; v1@44.999,15.789 J4.15 ; v1(50.477,16.822) R37.2 ; v1(50.477,19.881) R33.2
  Top Layer w0.6: v1(51.187,22.733) 52.203,22.733 ; v1@52.203,21.336 52.203,22.733 ; FB2.2 52.203,22.733
  Mid-Layer 1 w0.2: 25.019,22.606 J3.1 ; 44.999,16.582 45.006,16.589
  other v1: 45.085,15.789 52.197,21.336
pads on no net: J5. J6. J7.2
copper on no net:
  other v2: 42.346,11.189 42.346,20.789 42.346,47.328 42.346,56.928

## Polygon pours and split planes (outlines as drawn)
AGND on Mid-Layer 2 "GND" (solid, remove dead copper, pour order 11): -15.284,76.327 -15.157,76.2 -15.157,-6.731 109.811,-6.731 108.922,-5.842 108.922,75.946
AGND on Bottom Layer "GND-BOT" (solid, remove dead copper, pour order 26): -7.112,82.804 -7.62,82.804 -10.668,79.756 -14.478,75.946 -14.478,26.543 -14.478,-2.921 -8.128,-9.271 -5.207,-12.192 116.459,-12.192 116.459,-10.541 120.269,-6.731 117.602,-4.064 117.602,67.437 117.602,79.248 115.316,81.534
SFP_3V3A on Mid-Layer 1 "Top Layer-No Net" (solid, remove dead copper, pour order 7): 0,68 51.562,68 51.562,44.958 51.435,44.831 48.514,44.831 -0.127,44.831
SFP_3V3B on Mid-Layer 1 "Top Layer-No Net" (solid, remove dead copper, pour order 9): 0,0.254 0,23.241 50.673,23.241 50.927,22.987 50.927,8.509 0.127,8.509 0,8.636
P0_1V on Mid-Layer 1 "Top Layer-No Net" (solid, remove dead copper, pour order 19): 58.547,48.768 57.658,47.879 57.658,46.99 57.658,46.827 58.096,46.388 58.257,46.228 62.484,46.228 64.389,46.228 66.167,48.006 68.418,50.257 69.383,50.257 71.56,50.257 71.9,50.597 72.009,50.706 72.009,51.435 71.755,51.689 70.104,51.689 69.596,52.197 69.596,53.721 70.231,54.356 70.612,54.737 70.612,55.484 70.612,55.626 68.598,57.64 68.453,57.785 65.786,57.785 64.516,57.785 63.7,56.969 62.484,55.753 62.484,55.626 62.484,54.629 62.484,54.61 63.109,53.985 63.119,53.975 65.405,53.975 66.929,53.975 67.31,53.594 67.437,53.467 67.437,52.959 64.708,50.23 63.246,48.768 61.087,48.768
P1_1V on Mid-Layer 1 "Top Layer-No Net" (solid, remove dead copper, pour order 21): 58.42,10.414 58.039,10.033 57.658,9.652 57.658,9.017 57.658,8.128 58.039,7.747 59.563,7.747 60.833,9.017 66.802,9.017 70.993,9.017 72.644,10.668 72.898,10.922 72.898,14.224 72.898,15.621 72.263,16.256 68.072,20.447 67.818,20.447 64.135,20.447 63.5,19.812 63.5,19.05 63.5,16.51 63.754,16.256 64.008,16.002 64.77,16.002 64.897,16.002 65.151,16.256 65.278,16.383 65.278,18.034 65.278,19.177 65.532,19.431 66.04,19.431 66.421,19.431 66.548,19.304 67.183,18.669 67.945,18.669 69.342,17.272 71.755,14.859 71.755,14.224 71.755,13.589 71.501,13.335 71.12,12.954 71.12,12.446 71.12,11.176 70.485,10.541 69.977,10.033 68.199,10.033 66.802,10.033 65.913,10.922 65.659,11.176 64.897,11.176 62.484,11.176 62.103,10.795 61.722,10.414 58.928,10.414
+3.3V on Mid-Layer 1 "Top Layer-No Net" (solid, remove dead copper, pour order 23): 53.594,68.834 53.594,65.786 53.213,65.405 53.213,44.323 53.213,44.196 52.324,43.307 52.07,43.053 41.783,43.053 27.94,43.053 27.178,42.291 26.67,41.783 26.67,29.845 26.67,28.321 28.448,26.543 29.845,25.146 42.926,25.146 51.562,25.146 53.213,23.495 53.721,22.987 53.721,19.304 53.721,8.382 52.578,7.239 52.451,7.112 43.18,7.112 23.495,7.112 23.114,6.731 21.59,5.207 21.59,-0.508 21.59,-0.889 25.019,-4.318 25.781,-5.08 98.552,-5.08 99.06,-5.08 102.616,-1.524 103.124,-1.016 103.124,68.326 103.124,69.85 102.997,69.977

## Keep-outs
Keep-Out Layer:
  the board outline again, w0.254

## Other copper
Top Layer:
  rectangle net N96633: 61.976,11.938 62.865,12.827
  rectangle net N02024: 61.595,50.673 62.484,51.562
  region net +3.3V: 29.718,31.242 29.718,28.829 30.353,28.194 33.909,28.194 34.671,28.956 34.671,30.988 34.417,31.242
  region net N96633: 63.881,13.751 63.535,13.751 61.976,12.192 62.23,11.938 62.484,11.938 63.874,13.328 63.874,13.351 63.881,13.351
  region net N02024: 63.5,52.359 63.027,52.359 61.595,50.927 61.595,50.8 61.849,50.546 62.103,50.546 63.493,51.936 63.493,51.959 63.5,51.959
  region net P1_1V: 57.473,9.652 57.473,8.313 58.039,7.747 58.801,7.747 59.309,8.255 59.309,8.509 58.674,9.144 58.42,9.144 57.912,9.652
  region net P0_1V: 58.848,47.926 57.959,47.926 57.912,47.879 57.912,46.482 58.351,46.043 59.944,46.043 60.071,46.17 60.071,47.117 59.309,47.879 58.895,47.879
Mid-Layer 2:
  pour cut-out: 29.527,28.448 34.734,28.448 34.734,30.924 29.527,30.924
  pour cut-out: -4.191,62.103 -2.159,60.071 55.245,60.071 55.245,48.006 51.308,44.069 -0.889,44.069 -0.889,42.926 51.562,42.926 56.134,47.498 56.134,61.087 56.007,61.214 -0.508,61.214 -1.27,60.452
  pour cut-out: -4.191,25.964 -2.159,23.932 55.245,23.932 55.245,11.867 51.308,7.93 -0.889,7.93 -0.889,6.787 51.562,6.787 56.134,11.359 56.134,24.948 56.007,25.075 -0.508,25.075 -1.27,24.313
Bottom Layer:
  pour cut-out: 29.527,28.448 34.734,28.448 34.734,30.924 29.527,30.924
Multi-Layer:
  lines w0.254: 100,68 100,68 ; 100,68 0,68 0,0 100,0 100,68

## Silkscreen, mask and mechanical layers (free items; w line width, h text height)
Top Overlay:
  text "Engineering Sample V0.91" at 36.449,64.643 h1
  text "Designed By: Hans Kim" at 37.338,63.119 h1
  text "RESET" at 77.089,41.021 h1
  text "RESET" at 76.073,2.667 h1